# Altium PCB BMP_BME.pcbdoc
Units mm, origin at the board's own origin, x right, y up, seen from the top; angles counter-clockwise.
Board outline 77.98 x 74.93 mm, 2 copper layers (Top Layer, Bottom Layer); 20 components, 9 nets, 78 pads, 13 vias.
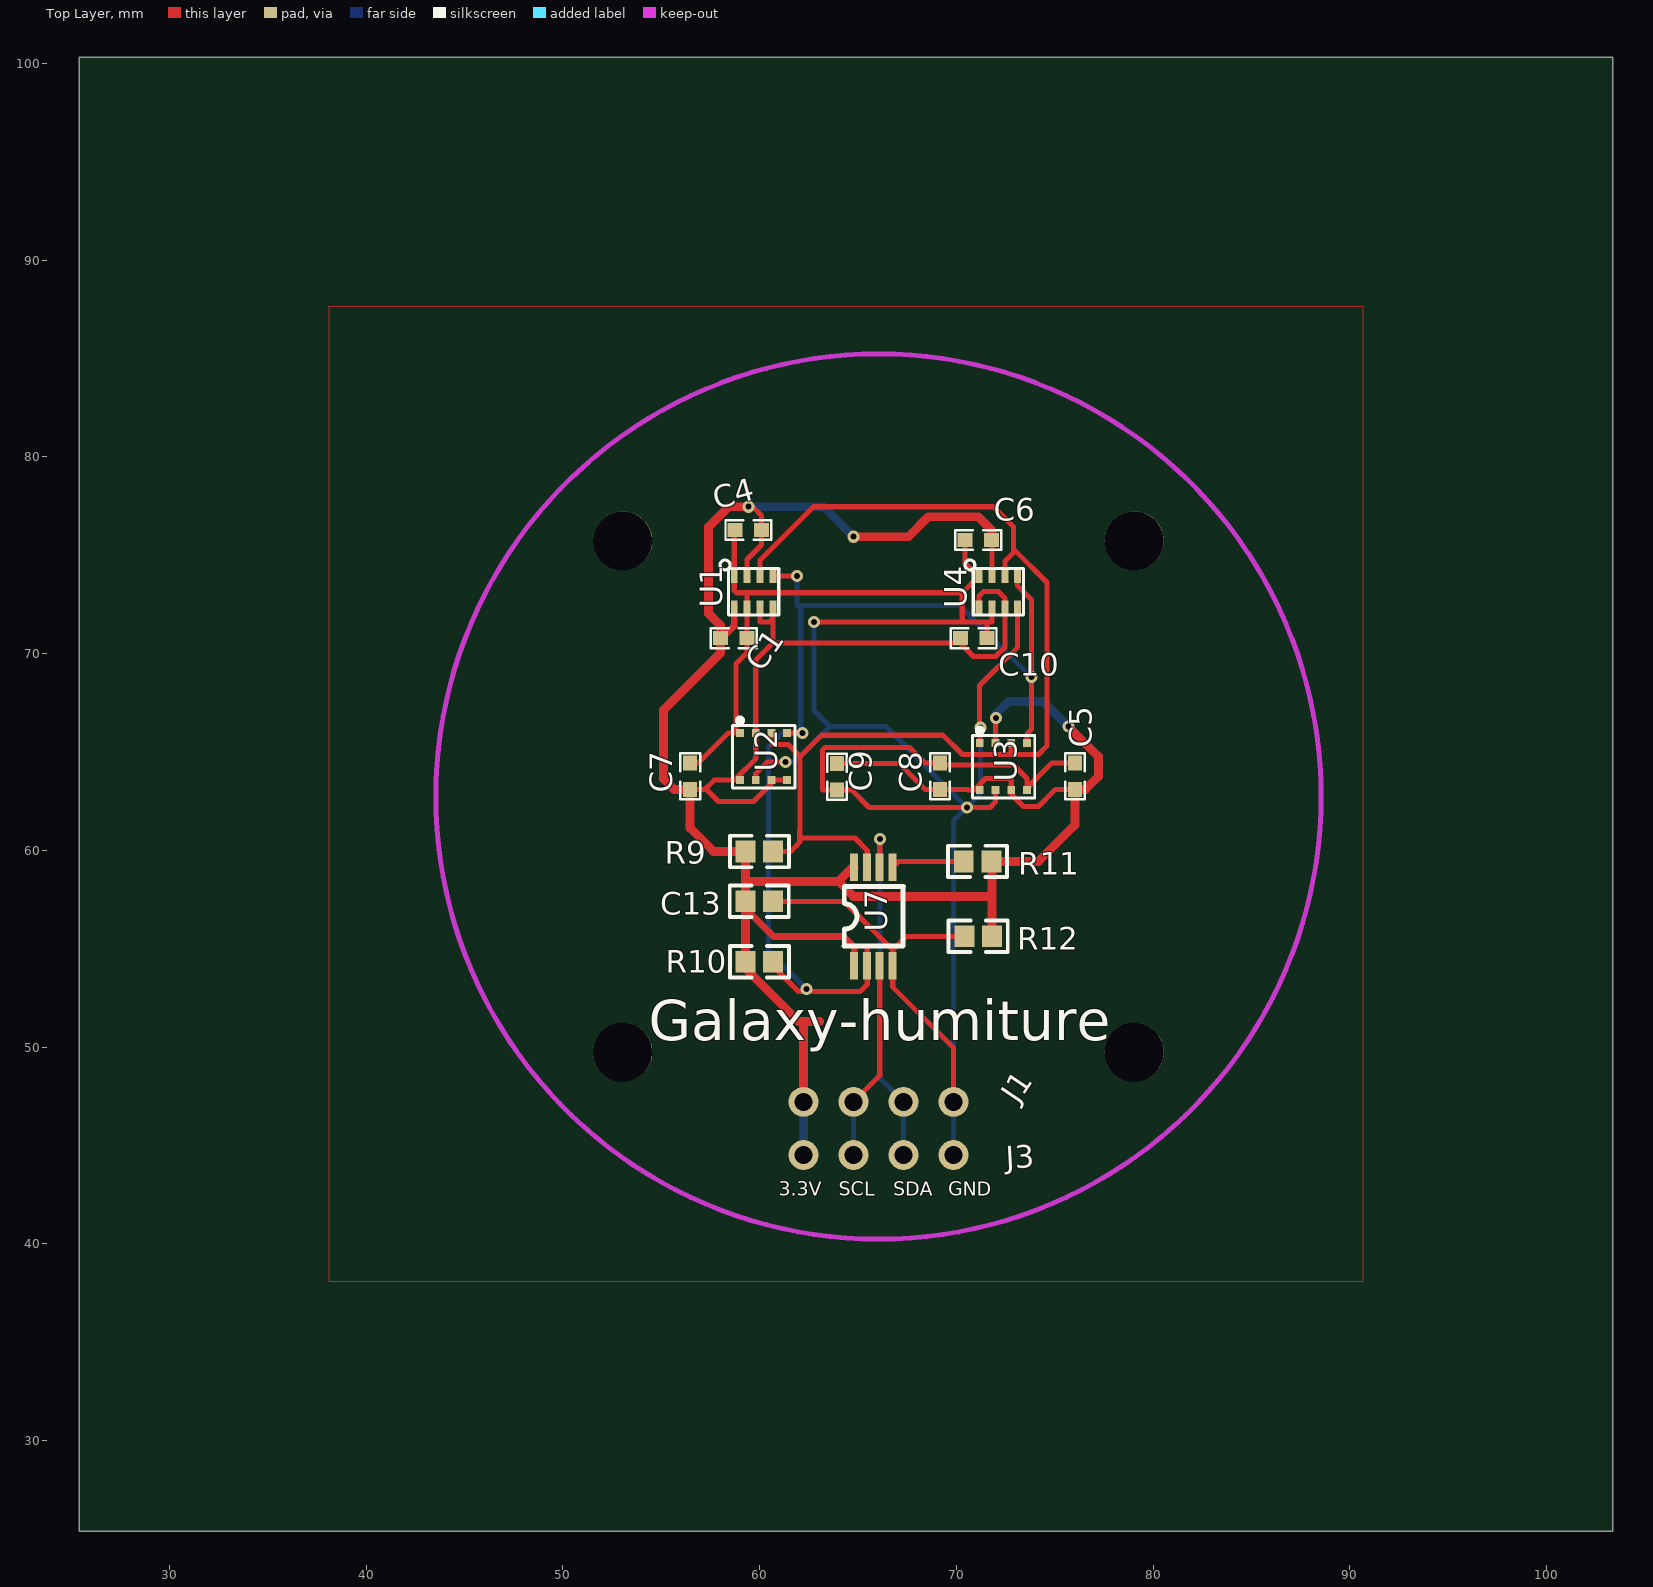
[diagram p0: Top Layer view]
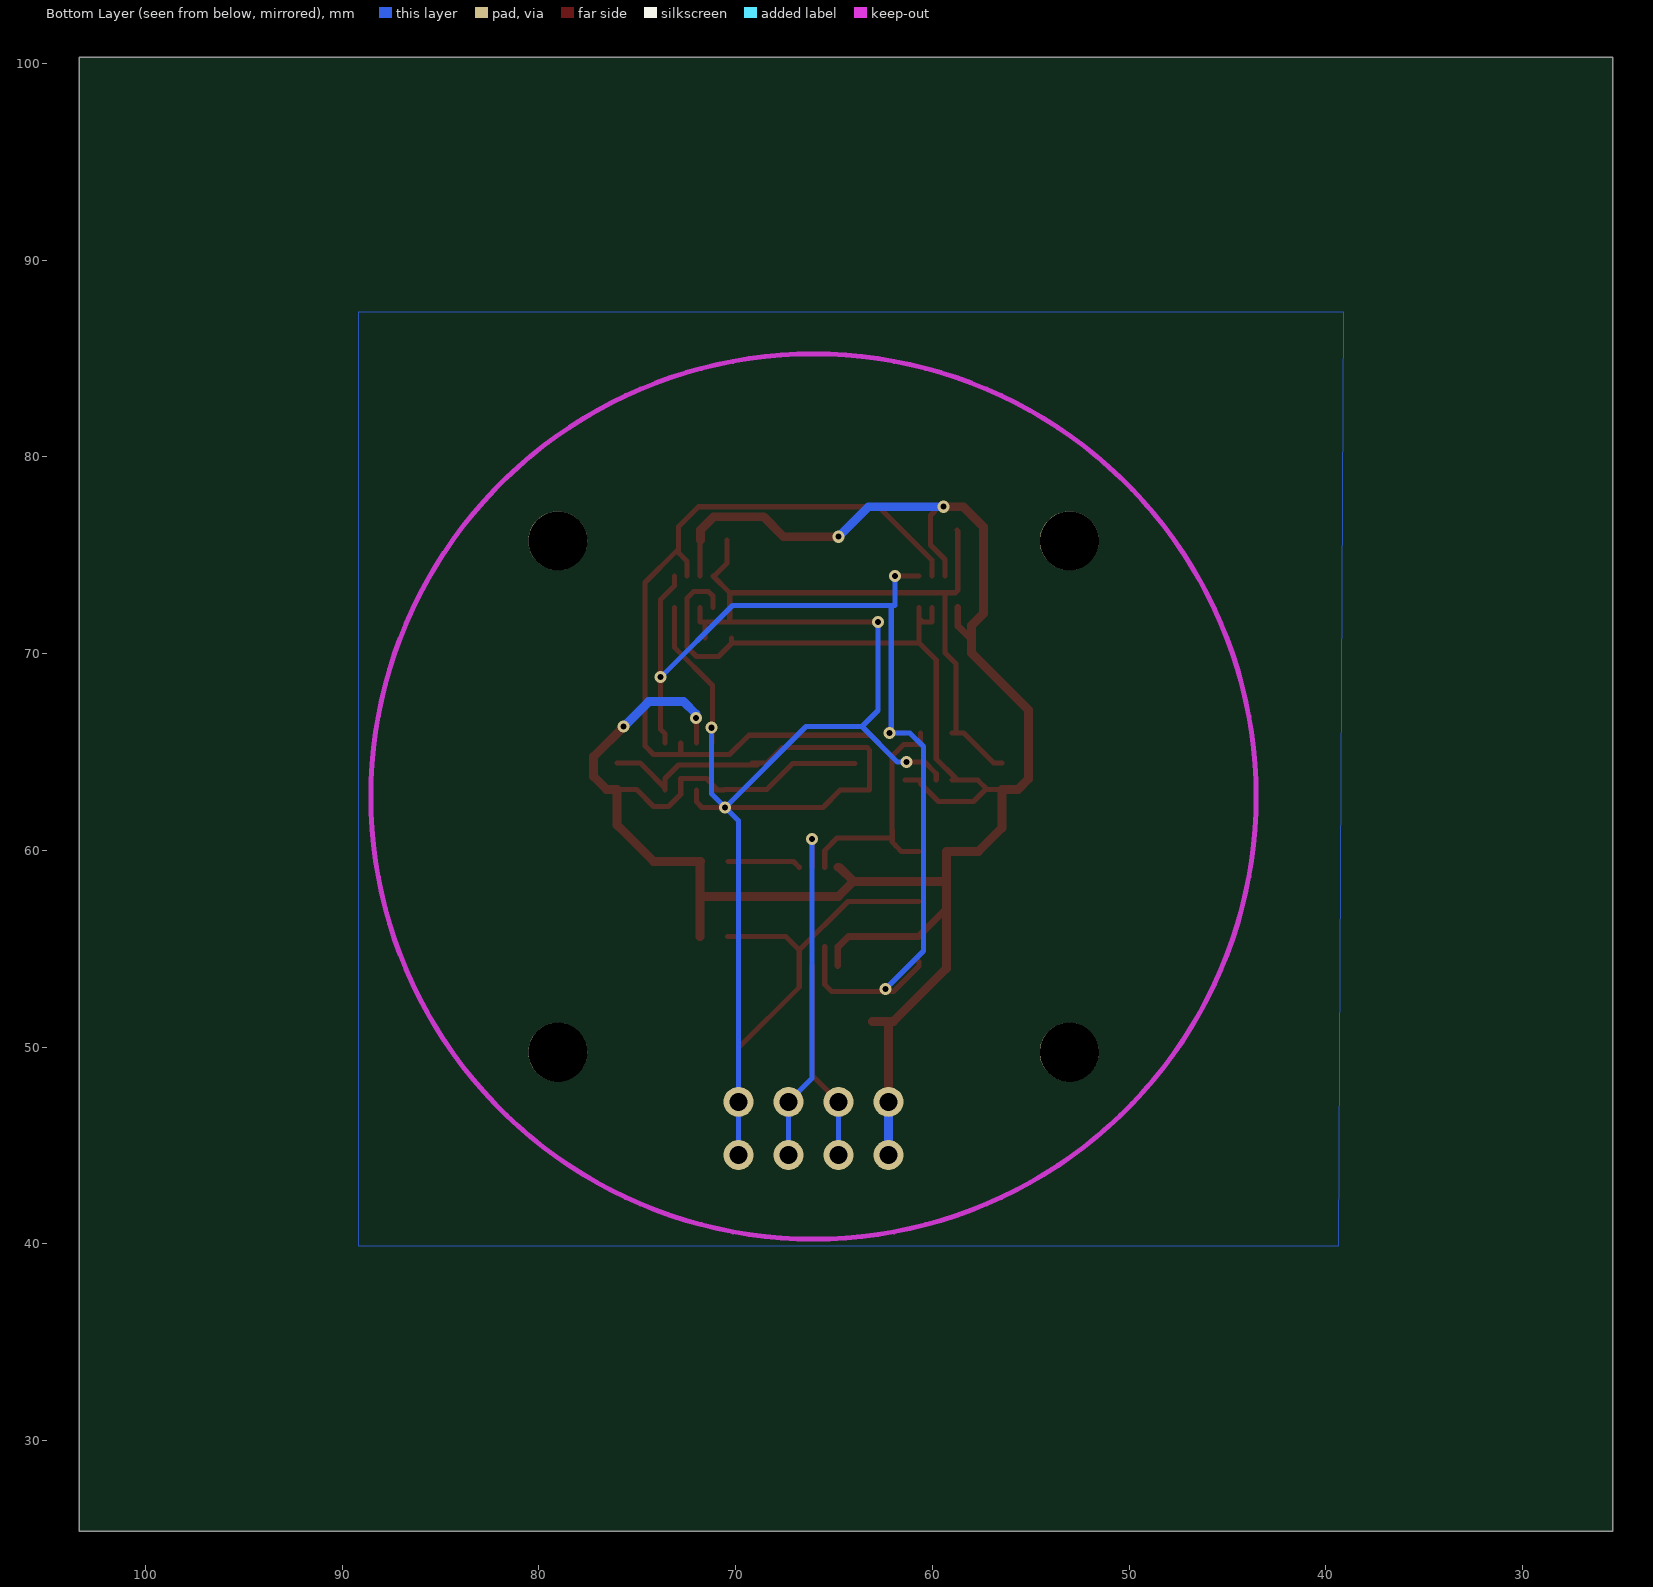
[diagram p1: Bottom Layer view, seen from below]

## Layer stack, top to bottom
Top Layer: signal copper (thickness not stored)
Dielectric: dielectric 0.32, FR-4, Dk 4.8
Bottom Layer: signal copper (thickness not stored)

## Board outline
103.378,25.4 25.4,25.4 25.4,100.33 103.378,100.33

## Components (designator, comment, footprint, x,y, rotation, side; value= is the part's Value field where it differs from the comment)
C1 "0.1uf" N0603 58.166,70.866 r180 top
C4 "0.1uf" N0603 59.944,76.2 r0 top
C5 "0.1uf" N0603 75.946,63.246 r270 top
C6 "0.1uf" N0603 71.628,75.692 r0 top
C7 "0.1uf" N0603 56.388,63.246 r270 top
C8 "1uf" N0603 69.088,63.246 r270 top
C9 "0.1uf" N0603 64.008,64.262 r90 top
C10 "1uf" N0603 70.358,70.866 r180 top
C13 "CAP-0603" 0603 60.78,57.408 r180 top
J1 "排针" PIN_4*2.54#1 62.23,46.482 r90 top
J3 "排针" PIN_4*2.54#2 62.23,44.958 r90 top
R9 "10K" 0603 59.182,59.944 r0 top
R10 "10K" 0603 59.182,54.336 r0 top
R11 "10K" 0603 71.882,59.436 r180 top
R12 "100K" 0603 70.31,55.628 r0 top
U1 "BMP280" LGA-8 59.69,73.152 r90 top
U2 "BME680" LGA-8-3X3MM 60.198,64.77 r90 top
U3 "BME680" LGA-8-3X3MM 72.39,64.262 r90 top
U4 "BMP280" LGA-8 72.136,73.152 r90 top
U7 "LTC4307CMS8#PBF" MSOP-8 65.786,56.642 r90 top

## Footprints (in the part's own frame and the unit in brackets; to place one, negate y for a bottom-side part, rotate by r counter-clockwise, add the part's x,y. Pads: shape width x height; smd on the part's side, far side on the other; paste and mask are expansions set on the pad)
0603 [mm]
  rect 1x1.1 smd: 1(0.1,0) 2(1.5,0)
  silkscreen extent -0.7,-0.8 2.3,0.8
LGA-8 [mil]
  rect 27.6x13.8 smd: 1(31.5,38.6) 2(31.5,13) 3(31.5,-13) 4(31.5,-38.6) 5(-31.5,-38.6) 6(-31.5,-13) 7(-31.5,13) 8(-31.5,38.6)
  silkscreen extent -46,-50 63,67
LGA-8-3X3MM [mm]
  rect 0.399x0.399 smd: 1(1.2,1.2) 2(1.2,0.4) 3(1.2,-0.4) 4(1.2,-1.2) 5(-1.2,-1.2) 6(-1.2,-0.4) 7(-1.2,0.4) 8(-1.2,1.2)
  silkscreen extent -1.59,-1.59 1.96,1.58
MSOP-8 [mil]
  rect 55x16 smd: 1(-98.5,38.5) 2(-98.5,12.5) 3(-98.5,-12.5) 4(-98.5,-38.5) 5(98.5,-38.5) 6(98.5,-12.5) 7(98.5,12.5) 8(98.5,38.5)
  silkscreen extent -60,-60 60,59
N0603 [mil]
  rect 30x28 smd: 1(6,3) 2(-47,3)
  silkscreen extent -66,-17 25,23
PIN_4*2.54#1 [mil]
  round 60 hole 36: 1(28.98,0) 2(28.98,-100) 3(28.98,-200) 4(28.98,-300)
PIN_4*2.54#2 [mil]
  round 60 hole 36: 1(-17.4,0) 2(-17.4,-100) 3(-17.4,-200) 4(-17.4,-300)

## Free pads (board coordinates)
  round 3 hole 3 unplated: ""(53.04,49.738) ""(53.04,75.738) ""(79.04,49.738) ""(79.04,75.738)

## Via types
v1: diameter 0.61, hole 0.31, Top Layer to Bottom Layer, 9 vias
v2: diameter 0.62, hole 0.305, Top Layer to Bottom Layer, 4 vias

## Nets (pads, with @x,y where several pads share a name; then routed paths per layer and width w, separated by ;. In a path a pad name is that pad's centre, name@x,y a point inside that pad or via, vN(x,y) a via of type N, cw(c..) or ccw(c..) an arc to the next point about the centre after c; other vN are vias at no path point)
3.3V: C1.1 C4.1 C5.1 C6.1 C7.1 C8.1 C9.1 C10.1 C13.2 J1.1 J3.1 R9.1 R10.1 R11.1 R12.2 U1.2 U1.5 U1.6 U1.8 U2.2 U2.5 U2.6 U2.8 U3.2 U3.6 U3.8 U4.2 U4.6 U4.8 U7.1 U7.8 | length 161.8
  Top Layer w0.26: C7.1 56.838,63.094 ; 58.39,59.944 R9.1 ; 58.702,63.569 U2.8@58.829,63.569 ; U2.8 57.69,63.57 57.213,63.094 56.838,63.094 ; U2.8@58.999,63.569 U2.8@58.829,63.569 ; U1.2 59.36,74.79 60.096,75.527 60.096,75.903 C4.1 60.096,77.023 59.649,77.47 v2(59.436,77.47) ; U1.6 60.02,71.608 60.485,71.608 60.67,71.793 ; U2.6 60.598,63.392 60.452,63.246 59.69,62.484 57.912,62.484 57.302,63.094 56.838,63.094 ; U2.6@60.599,63.569 U2.5@61.399,63.569 ; U1.5 60.67,71.981 60.67,71.793 ; C9.1 67.094,64.414 68.415,63.094 68.791,63.094 C8.1 70.566,63.094 70.599,63.061 70.894,63.061 ; U4.8 71.156,72.934 71.374,73.152 72.136,73.152 72.39,72.898 72.466,72.822 U4.6 ; U3.8@71.191,63.061 70.894,63.061 ; C6.1 71.806,75.743 U4.2 ; R11.1@71.783,58.964 R11.1 ; U3.2 71.99,66.7 v2@72.014,66.724 ; 72.151,70.005 72.466,70.322 ; U4.6@72.466,72.593 U4.6 ; U3.6 72.79,62.846 72.898,62.738 73.406,62.23 74.168,62.23 75.031,63.093 C5.1 ; U3.6@72.791,63.061 72.791,63.652 71.486,63.652 70.894,63.061 ; U2.8@58.829,63.569 58.829,63.673 59.799,64.643 59.799,65.969 59.799,69.675 60.67,70.546 ; 60.67,70.546 60.67,71.608 60.67,71.793 ; 60.67,70.546 70.206,70.546 C10.1 70.206,70.51 70.866,69.85 71.994,69.85 72.466,70.322 ; 72.466,70.322 U4.6
  Top Layer w0.35: C1.1 58.09,70.79 58.674,71.374 58.71,71.41 U1.8 ; C13.2 59.28,57.052 60.706,55.626 64.262,55.626 64.77,55.118 64.808,55.08 U7.1
  Top Layer w0.45: R9.1 59.281,58.423 59.28,58.422 ; R9.1 57.658,59.944 56.464,61.138 C7.1 55.654,63.094 55.56,63.188 55.118,63.63 55.118,63.759 55.118,64.806 55.118,67.145 58.014,70.04 C1.1 58.014,71.427 57.404,72.037 57.404,76.454 58.42,77.47 v2(59.436,77.47) ; J1.1 62.23,51.295 ; 63.053,51.295 63.04,51.308 61.976,51.308 59.282,54.002 R10.1 59.282,57.406 C13.2 59.28,58.422 ; v2(64.77,75.946) 67.564,75.946 ; U7.8 64.729,59.144 64.006,58.422 ; 65.286,75.946 67.564,75.946 ; 71.745,57.658 64.77,57.658 64.006,58.422 ; C6.1 71.78,76.302 71.12,76.962 68.58,76.962 67.564,75.946 ; R12.2 71.81,59.408 R11.1 74.168,59.436 75.946,61.214 76.022,61.29 C5.1 76.555,63.093 77.216,63.754 77.216,64.77 v2(75.692,66.294) ; 59.28,58.422 64.006,58.422
  Bottom Layer w0.45: v2(59.436,77.47) 63.246,77.47 v2(64.77,75.946) ; J3.1 J1.1 ; v2@72.014,66.724 72.014,66.934 72.644,67.564 74.422,67.564 v2(75.692,66.294)
  other v2: 72.014,66.725
GND: C1.2 C4.2 C5.2 C6.2 C7.2 C8.2 C9.2 C10.2 C13.1 J1.4 J3.4 R12.1 U1.1 U1.7 U2.1 U2.7 U3.1 U3.5 U3.7 U4.1 U4.5 U4.7 U7.4 | length 138.8
  Top Layer w0.26: C7.2 56.838,64.44 56.876,64.44 58.407,65.969 58.763,65.969 58.788,65.969 ; 58.71,75.486 U1.1 ; C4.2 58.71,76.236 U1.1 ; U2.1 58.788,65.969 ; U2.7@59.799,63.569 59.799,63.901 60.391,64.493 v1(61.318,64.493) ; C13.1 64.294,57.408 66.764,54.938 ; v1(62.761,71.608) 70.3,71.608 ; C8.2 68.791,64.44 ; J1.4 69.85,49.962 66.764,53.048 U7.4 66.764,54.938 ; R12.1 67.454,55.628 66.764,54.938 ; C6.2 70.434,74.6 70.866,74.168 71.082,73.952 U4.1 70.3,73.094 ; U3.1 71.191,66.2 v1(71.227,66.236) 71.171,66.291 71.171,68.377 73.116,70.322 U4.5 ; C10.2 71.552,71.537 ; U4.7 71.806,71.608 71.623,71.608 71.552,71.537 ; U3.7@71.991,63.061 71.991,62.469 71.704,62.184 v1(70.531,62.184) 65.562,62.184 64.681,63.068 C9.2 63.185,63.068 63.185,65.095 63.315,65.225 67.63,65.225 68.415,64.44 68.791,64.44 ; U3.5 73.59,63.176 74.676,64.262 74.854,64.44 C5.2 ; U3.5@73.591,63.061 73.591,63.652 72.898,64.346 68.882,64.346 68.791,64.44 ; U1.1 58.71,73.208 58.824,73.094 59.36,73.094 ; 58.788,65.969 58.788,69.469 59.36,70.04 59.36,70.416 C1.2 U1.7 59.36,72.593 59.36,73.094 ; 59.36,73.094 70.3,73.094 ; 70.3,71.608 71.481,71.608 71.552,71.537 ; 70.3,71.608 70.3,73.094
  Bottom Layer w0.26: v1(61.318,64.493) 61.778,64.493 63.581,66.297 ; v1(62.761,71.608) 62.761,67.117 63.581,66.297 ; J3.4 J1.4 69.85,61.504 v1(70.531,62.184) ; v1(71.227,66.236) 71.227,62.88 v1(70.531,62.184) ; 63.581,66.297 66.418,66.297 v1(70.531,62.184)
S$67: 
S$69: 
SCL0: J1.2 J3.2 U7.3 | length 10.2
  Top Layer w0.26: J1.2 66.103,48.552 U7.3
  Bottom Layer w0.26: J3.2 J1.2
SCL1: R10.2 U1.4 U2.4 U3.4 U4.4 U7.2 | length 55.3
  Top Layer w0.26: U1.4 v1(61.89,73.952) ; R10.2 60.682,54.126 61.976,52.832 65.114,52.832 65.4,53.118 65.468,53.187 U7.2 65.468,54.554 65.468,55.1 ; U2.4@61.399,65.969 61.991,65.969 v1(62.182,65.969) ; U4.4 73.116,73.444 73.353,73.208 73.81,72.753 v1(73.81,68.804) 73.81,66.142 73.591,65.923 U3.4@73.591,65.461
  Bottom Layer w0.26: v1@61.89,65.969 v1(62.182,65.969) 61.143,65.969 60.452,65.278 60.452,54.879 v1(62.377,52.954) ; v1(61.89,73.952) 61.89,72.448 70.165,72.448 v1(73.81,68.804) ; v1@62.09,65.949 62.09,72.428
SDA0: J1.3 J3.3 U7.6 | length 18
  Top Layer w0.26: U7.6 66.103,60.561 v1(66.116,60.574)
  Bottom Layer w0.26: v1(66.116,60.574) 66.116,48.412 J1.3 J3.3
SDA1: R9.2 U1.3 U2.3 U3.3 U4.3 U7.7 | length 55.9
  Top Layer w0.26: U1.3 60.02,74.694 60.02,74.752 62.738,77.47 71.882,77.47 72.898,76.454 72.898,75.127 72.842,75.072 ; U2.3 60.599,65.377 61.455,65.377 62.062,64.77 63.147,65.855 69.319,65.855 70.305,64.869 72.791,64.869 ; R9.2 61.575,59.944 61.864,60.234 61.864,60.242 62.04,60.418 62.04,61.027 62.052,61.04 ; 62.04,60.625 64.843,60.625 65.42,60.048 65.468,60 U7.7 ; 62.052,60.764 62.052,64.77 ; U4.3 72.466,74.694 72.997,75.227 74.612,73.612 74.612,65.314 74.171,64.869 72.791,64.869 ; U3.3 72.791,64.869
U7_5: R11.2 U7.5 | length 3.7
  Top Layer w0.26: U7.5 67.056,59.436 R11.2

## Polygon pours and split planes (outlines as drawn)
GND on Bottom Layer (solid): 39.116,87.376 39.37,39.878 89.154,39.878 89.154,87.376 39.37,87.376
GND on Top Layer (solid): 38.1,87.63 38.1,38.1 90.678,38.1 90.678,87.63 38.1,87.63

## Keep-outs
Keep-Out Layer:
  lines w0.254: 43.54,62.738 cw(c66.04,62.738) 88.54,62.738 cw(c66.04,62.738) 43.54,62.738

## Silkscreen, mask and mechanical layers (free items; w line width, h text height)
Top Overlay:
  text "Galaxy-humiture" at 54.356,50.361 h2.03
  text "3.3V" at 60.96,42.449 h0.7
  text "SCL" at 64.008,42.449 h0.7
  text "SDA" at 66.802,42.449 h0.7
  text "GND" at 69.596,42.449 h0.7
Document:
  lines w0.003: 64.364,62.84 64.414,62.89